# Altium PCB TSAL-P01-V00-TSALControl.PcbDoc
Units mm, origin at the board's own origin, x right, y up, seen from the top; angles counter-clockwise.
Board outline 48 x 24 mm, 2 copper layers (Top Layer, Bottom Layer), stack 1.569 mm thick; 23 components, 17 nets, 73 pads, 15 vias.
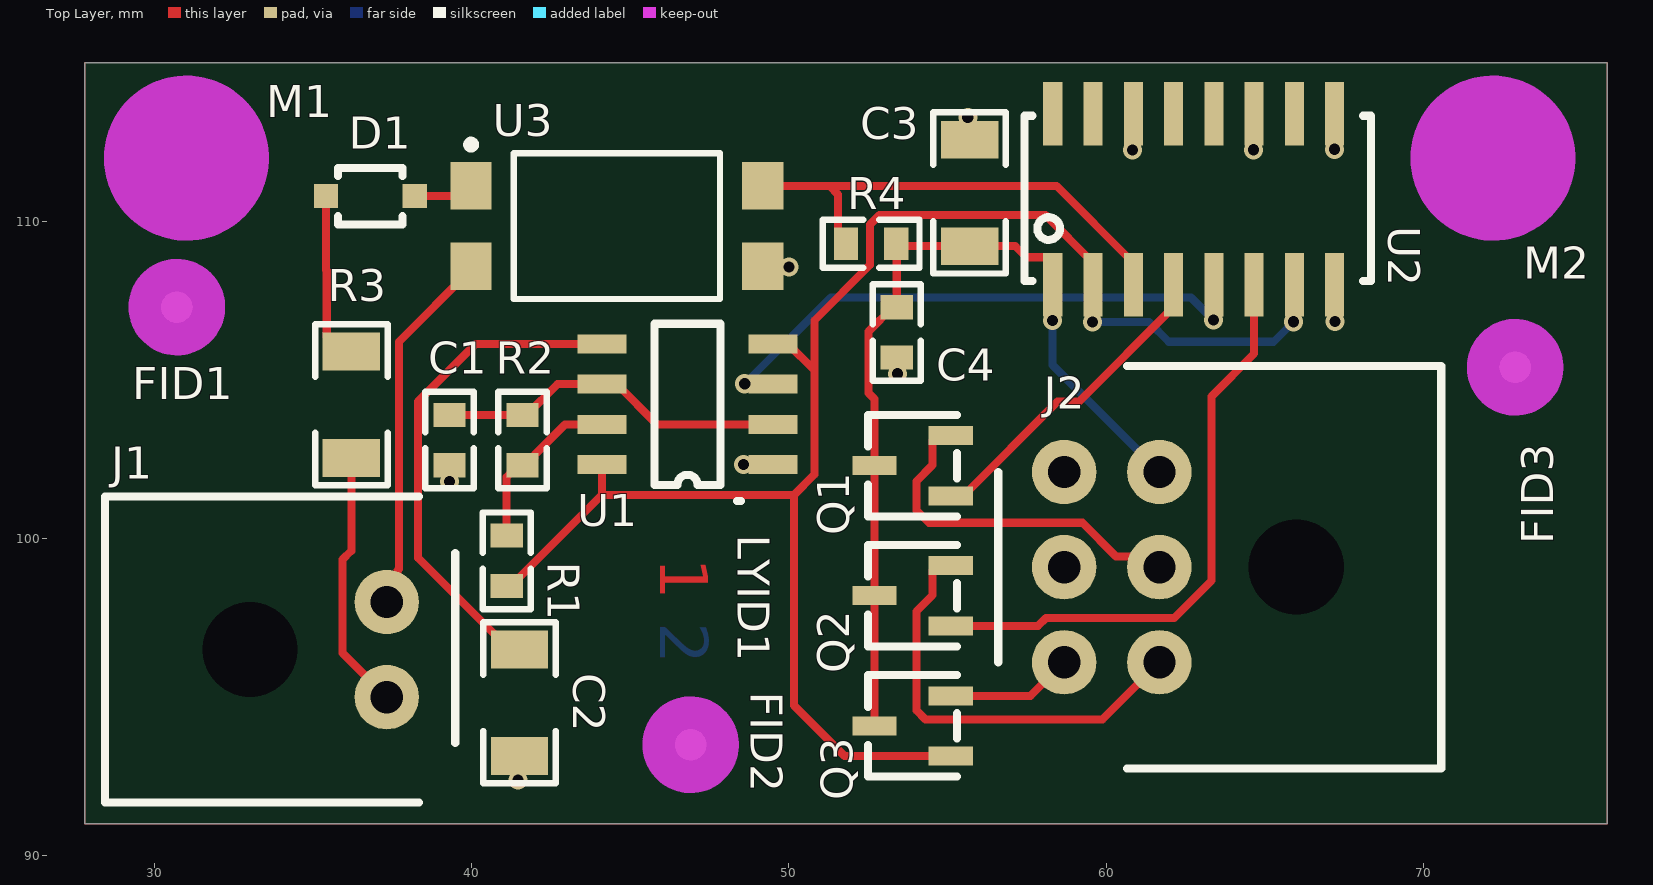
[diagram p0: Top Layer view]
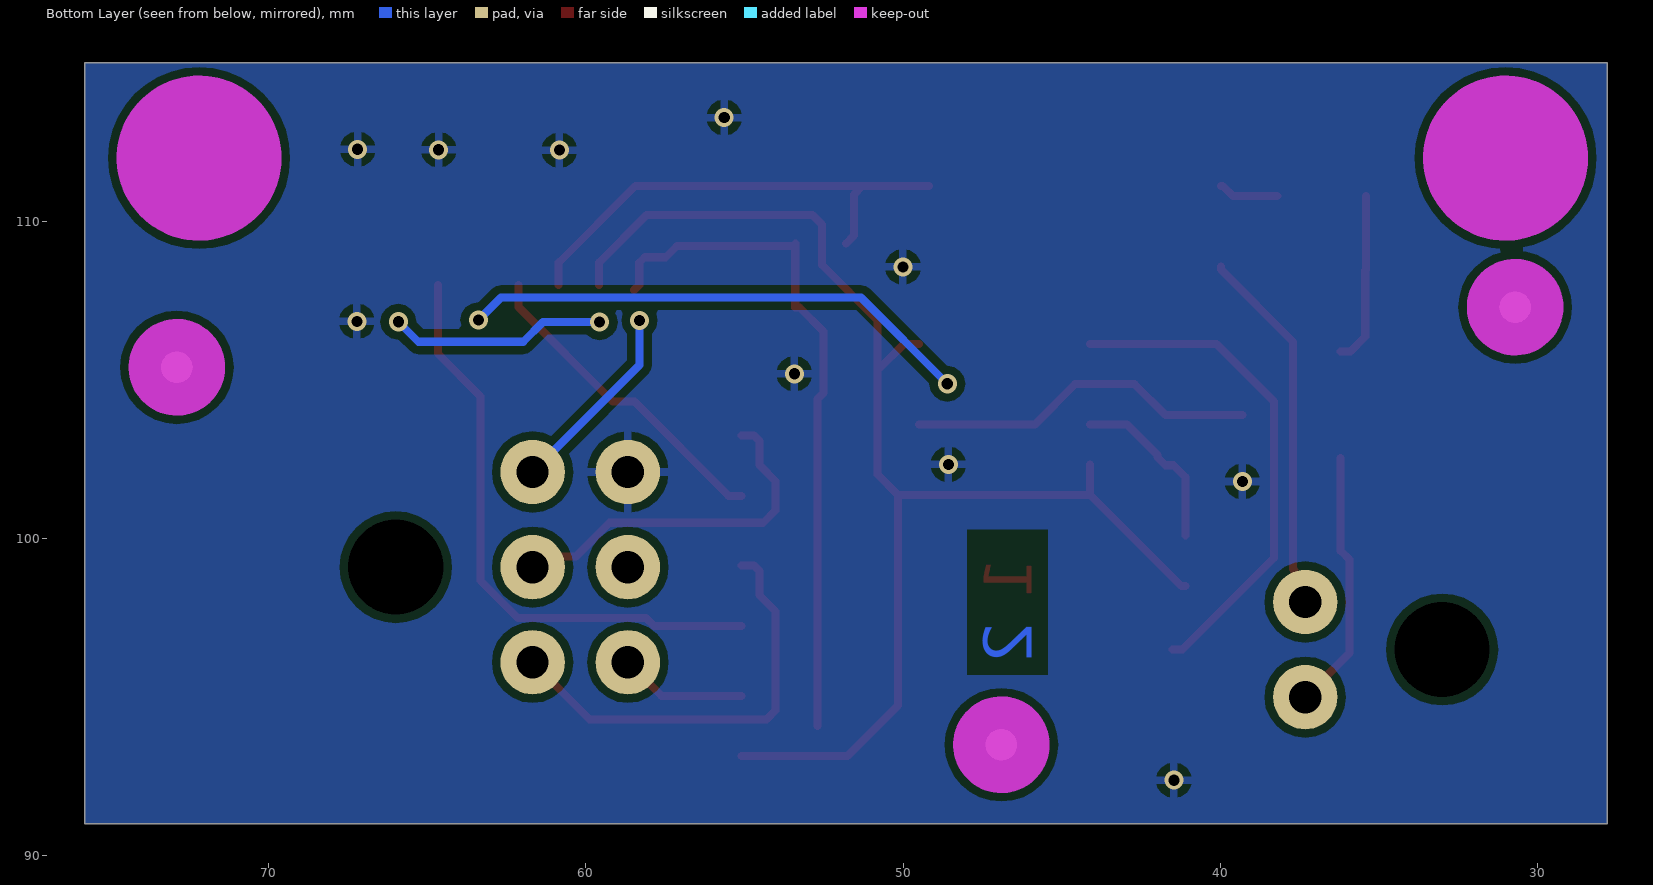
[diagram p1: Bottom Layer view, seen from below]
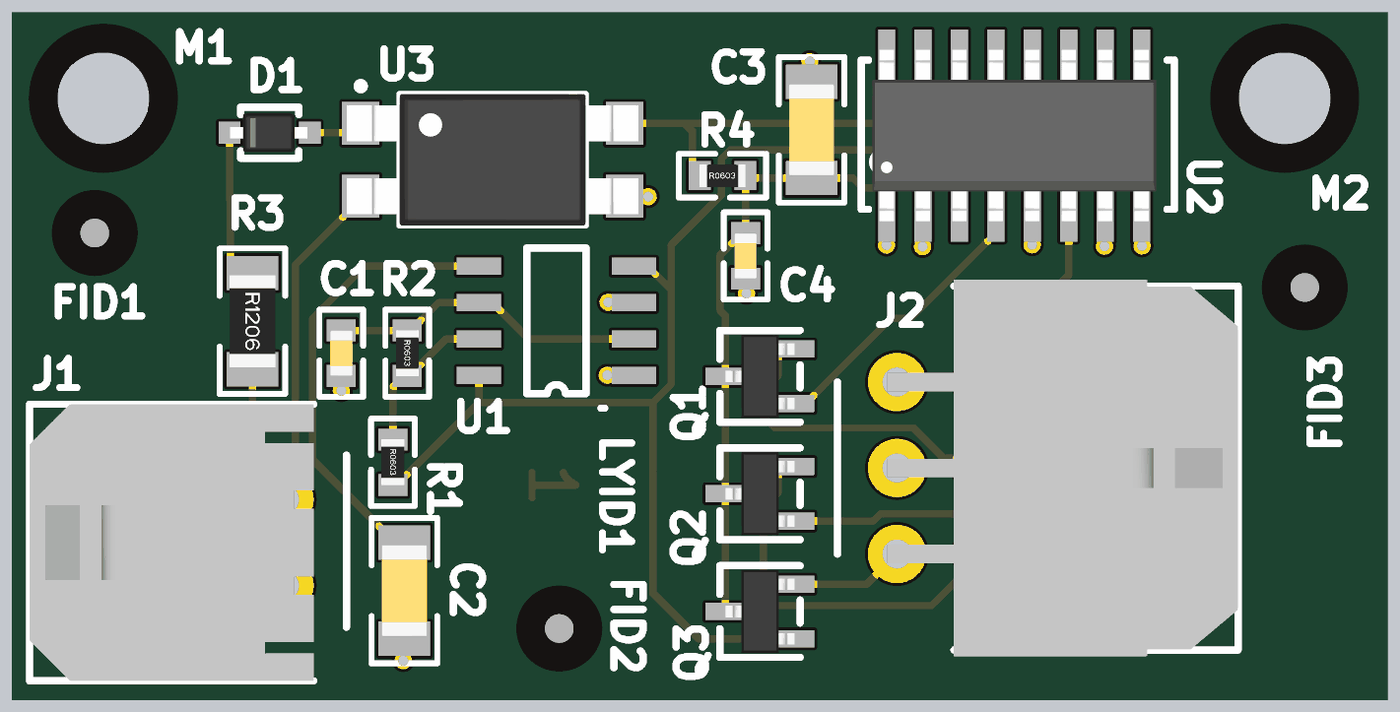
[diagram p2: 3D render of the assembled board from above, using the file's embedded part models]

## Layer stack, top to bottom
Top Solder: solder mask 0.0254, SM-001, Dk 4
Top Layer: signal copper 0.035
Dielectric 1: core 1.4986, Core-043, Dk 4.3
Bottom Layer: signal copper 0.035
Bottom Solder: solder mask 0.0254, SM-001, Dk 4

## Board outline
27.8,91 27.8,115 75.8,115 75.8,91

## Design rules (kind name [scope] priority, off if disabled: settings)
Clearance [All] p1: gap=0.254 ignorepadtopadclearanceinfootprint=FALSE except(0: Arc-Hole Track-Hole SMDPad-Hole THPad-Hole Via-Hole Fill-Hole Poly-Hole Region-Hole Text-Hole)
HoleSize [All] p1: absolutevalues=TRUE maxlimit=3.6 minlimit=0.025 maxpercent=80.000 minpercent=20.000
PolygonConnect [All] p1: connectstyle=Relief reliefconductorwidth=0.254 reliefentries=4 polygonreliefangle="90 Angle" airgapwidth=0.254
RoutingVias [All] p1: holewidth=0.711 width=1.27 viastyle="Through Hole" minholewidth=0.711 minwidth=1.27 maxholewidth=0.711 maxwidth=1.27
SilkToSilkClearance [All] p1: silktosilkclearance=0
SilkToSolderMaskClearance [IsPad] p1: minsilkscreentomaskgap=0 clearancetoexposedcopper=FALSE
SolderMaskExpansion [All] p1: expansion=0.102 istentingtop=FALSE
Width [All] p1: maxlimit=0.254 minlimit=0.254 preferedwidth=0.254
27 further rules are at their usual default settings.

## Components (designator, comment, footprint, x,y, rotation, side; value= is the part's Value field where it differs from the comment)
C1 "4u7 50V" Cap_Ceramic_0603 39.3,103.107 r90 top
C2 "10nF 25V 5% X7R 0402" Cap_Ceramic_1206 41.5,94.822 r90 top
C3 "22uF 35V" Cap_Ceramic_1206 55.7,110.9 r270 top
C4 "100nF 50V" Cap_Ceramic_0603 53.4,106.5 r90 top
D1 "MM3Z56VB" SOD-323F 34.009,110.673 r180 top
FID1 "Fiducial 1MM" "FIDUCIAL 1MM" 30.7,107.3 r270 top
FID2 "Fiducial 1MM" "FIDUCIAL 1MM" 46.9,93.5 r90 top
FID3 "Fiducial 1MM" "FIDUCIAL 1MM" 72.9,105.4 r180 top
J1 "Microfit 3.0 1x2" Microfit_1X2_R_TH 33,96.5 r270 top
J2 "Microfit 3.0 2x3" Microfit_2X3_R_TH 66,99.1 r90 top
LYID1 "2 Layer Identification PCB Marker" "LAYER IDENT 2" 46.7,98 r270 top
M1 "Hole M3 Tight Unplated" "M3.2 UNPLATED" 31,112 r0 top
M2 "Hole M3 Tight Unplated" "M3.2 UNPLATED" 72.2,112 r0 top
Q1 "CPH3351" SOT-23-3 53.9,102.3 r180 top
Q2 "CPH3351" SOT-23-3 53.9,98.2 r180 top
Q3 "CPH3351" SOT-23-3 53.9,94.093 r180 top
R1 "1k" Res_ThinFilm_0603 41.1,99.3 r270 top
R2 "51k" Res_ThinFilm_0603 41.6,103.107 r270 top
R3 "220R 5% 1206" Res_ThinFilm_1206 36.2,104.222 r270 top
R4 "1k 5% 0603" Res_ThinFilm_0603 52.593,109.3 r0 top
U1 "LM555CMX" "MCP2561 SOIC" 49.5,102.33 r180 top
U2 "CD4049UB" CD4049UB 67.21,108 r90 top
U3 "FOD817ASD" FOD817ASD 44.577,109.855 r0 top

## Footprints (in the part's own frame and the unit in brackets; to place one, negate y for a bottom-side part, rotate by r counter-clockwise, add the part's x,y. Pads: shape width x height; smd on the part's side, far side on the other; paste and mask are expansions set on the pad)
Cap_Ceramic_0603 [mil]
  rect 30x40 smd: 1(-31.24,0) 2(31.24,0)
  silkscreen extent -60,-30 60,30, body extent -31,-16 32,16, height 33
Cap_Ceramic_1206 [mil]
  rect 47x71 smd: 1(-66.08,0) 2(66.08,0)
  silkscreen extent -100,-45 100,45, body extent -63,-31 63,32, height 53
CD4049UB [mm]
  rect 2x0.6 smd: 1(0,8.89) 2(0,7.62) 3(0,6.35) 4(0,5.08) 5(0,3.81) 6(0,2.54) 7(0,1.27) 8(0,0) 9(5.4,0) 10(5.4,1.27) 11(5.4,2.54) 12(5.4,3.81) 13(5.4,5.08) 14(5.4,6.35) 15(5.4,7.62) 16(5.4,8.89)
  silkscreen extent 0.13,-1.14 5.33,9.78, body extent -0.29,-0.51 5.69,9.39, height 1.35
"FIDUCIAL 1MM" [mm]
  round 1 smd mask+1: 1(0,0)
  round 1 smd far side mask+1: 1(0,0)
  Keep-Out Layer circle w1.524: c0,0 r0.762
FOD817ASD [mm]
  rect 1.3x1.5 smd: 1(-4.6,1.27) 2(-4.6,-1.27) 3(4.6,-1.27) 4(4.6,1.27)
  silkscreen extent -4.72,-2.3 3.25,2.69, body extent -5.08,-2.3 5.08,2.3, height 3.85
"LAYER IDENT 2" [mm]
  Top Layer pour cut-out: 4.826,3.81
  Top Layer pour cut-out: -2.286,1.27 -2.286,-1.27 2.286,-1.27 2.286,1.27
  Top Layer pour cut-out: -0.254,0.762
  Top Layer pour cut-out: -0.508,-0.127
  Bottom Layer pour cut-out: -2.286,1.27 -2.286,-1.27 2.286,-1.27 2.286,1.27
"M3.2 UNPLATED" [mm]
  round 0 hole 3.2 unplated mask+2.6: 1(0,0)
  Keep-Out Layer circle w2.667: c0,0 r1.27
"MCP2561 SOIC" [mm]
  rect 1.55x0.6 smd: 1(0,0) 2(0,-1.27) 3(0,-2.54) 4(0,-3.81) 5(5.4,-3.81) 6(5.4,-2.54) 7(5.4,-1.27) 8(5.4,0)
  silkscreen extent 1.02,-4.44 3.74,1.14, body extent 0.51,-4.38 4.64,0.52, height 1.65
Microfit_1X2_R_TH [mil]
  round 80 hole 40: 1(59.06,170) 2(-59.06,170)
  round 0 hole 118.11 mask+10: NC(0,0)
  silkscreen extent -190,-180 190,255, body extent -190,-180 190,210, height 223
Microfit_2X3_R_TH [mil]
  round 80 hole 40: 1(118.11,170) 2(0,170) 3(-118.11,170) 4(118.11,288.19) 5(0,288.19) 6(-118.11,288.19)
  round 0 hole 118.11 mask+10: NC(0,0)
  silkscreen extent -250,-180 250,370, body extent -259,-180 259,302, height 350
Res_ThinFilm_0603 [mil]
  rect 30x40 smd: 1(-31.24,0) 2(31.24,0)
  silkscreen extent -60,-30 60,30, body extent -31,-16 32,16, height 18
Res_ThinFilm_1206 [mil]
  rect 47x71 smd: 1(-66.08,0) 2(66.08,0)
  silkscreen extent -100,-45 100,45, body extent -63,-31 63,32, height 24
SOD-323F [mil]
  rect 30x30 smd: 1(-165,-5) 2(-55,-5)
  silkscreen extent -150,-40 -70,30, body extent -162,-32 -56,22, height 33
SOT-23-3 [mm]
  rect 1.4x0.6 smd: D(1.2,0) G(-1.2,0.95) S(-1.2,-0.95)
  silkscreen extent -1.4,-1.6 1.4,1.6, body extent -1.2,-1.45 1.2,1.45, height 1

## Part data
C1: library part "4u7 50V 5% X7R 0603", "Capacitor, Ceramic, SMD, 4u7, 50V, 5%, X7R, 0603"
C2: "10000pF ±5% 25V Ceramic Capacitor X7R 0402 (1005 Metric)", ComponentLink1Description=Digikey, ComponentLink1URL=https://www.digikey.com/product-detail/en/murata-electronics/GRM155R71E103JA01J/490-6340-1-ND/3845537, ComponentLink2Description=Datasheet, ComponentLink2URL=https://search.murata.co.jp/Ceramy/image/img/A01X/G101/ENG/GRM155R71E103JA01-01.pdf
C3: library part "22uF 35V 20% X5R 1206", "22µF ±20% 35V Ceramic Capacitor X5R 1206 (3216 Metric)", ComponentLink1Description=Digikey, ComponentLink1URL=https://www.digikey.com.au/product-detail/en/tdk-corporation/C3216X5R1V226M160AC/445-8045-1-ND/2792165, ComponentLink2Description=Datasheet, ComponentLink2URL=https://product.tdk.com/info/en/catalog/datasheets/mlcc_commercial_general_en.pdf
C4: library part "100nF 50V 5% X7R 0603", "Capacitor, Ceramic, SMD, 100nF, 50V, 5%, X7R, 0603"
D1: "Zener Diode 56V 200mW ±2% Surface Mount SOD-323F", Manufacturer="ON Semiconductor", ComponentLink1Description=Digikey, ComponentLink1URL=https://www.digikey.com.au/product-detail/en/on-semiconductor/MM3Z56VB/MM3Z56VBCT-ND/1626897, ComponentLink2Description=Datasheet, ComponentLink2URL=https://www.onsemi.com/pub/Collateral/MM3Z9V1B-D.pdf, MPN=MM3Z56VB
J1: library part Microfit_1x2
J2: library part Microfit_2x3
LYID1: library part "Layer Identification 2"
M1 M2: "M3.2 Hole, No Plating"
Q1 Q2 Q3: "P-Channel 60V 1.8A (Ta) 1W (Ta) Surface Mount 3-CPH", ComponentLink1Description=Datasheet, ComponentLink1URL=https://www.onsemi.com/pub/Collateral/CPH3351-D.PDF, ComponentLink2Description=Digikey, ComponentLink2URL=https://www.digikey.com/products/en/discrete-semiconductor-products/transistors-fets-mosfets-single/278?k=&pkeyword=&sv=0&pv7=2&sf=0&FV=-1%7C488%2C-8%7C278&mpart=CPH3351-TL-W&quantity=&ColumnSort=0&page=1&stock=1&nstock=1&datasheet=1&photo=1&pageSize=25
R1: library part "1k 5% 0603", "Resistor, SMD, 1k, 0.1W, 5%, 0603"
R2: library part "51k 5% 0603", "51 kOhms ±0.1% 0.063W, 1/16W Chip Resistor 0402 (1005 Metric) Automotive AEC-Q200 Thin Film", ComponentLink1Description=Digikey, ComponentLink1URL=https://www.digikey.com.au/product-detail/en/panasonic-electronic-components/ERA-2AEB513X/P51KDCCT-ND/1706224, ComponentLink2Description=Datasheet1, ComponentLink2URL=https://industrial.panasonic.com/cdbs/www-data/pdf/RDM0000/AOA0000C307.pdf, ComponentLink3Description=Datasheet2, ComponentLink3URL=https://media.digikey.com/pdf/Data%20Sheets/Panasonic%20Resistors%20Thermistors%20PDFs/ERA_Series_LE.pdf, ComponentLink4Description=Datasheet3, ComponentLink4URL=https://industrial.panasonic.com/cdbs/www-data/pdf/RDM0000/DMM0000COL9.pdf
R3: "220 Ohms ±1% 0.25W, 1/4W Chip Resistor 1206 (3216 Metric) Moisture Resistant Thick Film", ComponentLink1Description=Digikey, ComponentLink1URL=https://www.digikey.com.au/product-detail/en/yageo/RC1206FR-07220RL/311-220FRCT-ND/731640, ComponentLink2Description=Datasheet, ComponentLink2URL=https://www.yageo.com/upload/media/product/productsearch/datasheet/rchip/PYu-RC_Group_51_RoHS_L_10.pdf
R4: "Resistor, SMD, 1k, 0.1W, 5%, 0603"
U1: "555 Type, Timer/Oscillator (Single) IC 100kHz 8-SOIC", ComponentLink1Description=Digikey, ComponentLink1URL=https://www.digikey.com.au/product-detail/en/texas-instruments/LM555CMX%2FNOPB/LM555CMX%2FNOPBCT-ND/1010545?utm_adgroup=Integrated%20Circuits&utm_source=google&utm_medium=cpc&utm_campaign=Dynamic%20Search_EN_Product&utm_term=&productid=&gclid=CjwKCAjwr7X4BRA4EiwAUXjbt-N3vibcCncJp7dB6lpBrLRT-QxYTJoHZmGPqFSswFIeP9Lhu7cYVBoCjmMQAvD_BwE, ComponentLink2Description=Datasheet, ComponentLink2URL=https://www.ti.com/general/docs/suppproductinfo.tsp?distId=10&gotoUrl=http%3A%2F%2Fwww.ti.com%2Flit%2Fgpn%2Flm555
U3: "Optoisolator 5kV Transistor 4SMD"

## Via types
v1: diameter 0.6, hole 0.35, Top Layer to Bottom Layer, 15 vias

## Nets (pads, with @x,y where several pads share a name; then routed paths per layer and width w, separated by ;. In a path a pad name is that pad's centre, name@x,y a point inside that pad or via, vN(x,y) a via of type N, cw(c..) or ccw(c..) an arc to the next point about the centre after c; other vN are vias at no path point)
12V: C3.2 C4.2 J2.1 Q1.D Q2.D Q3.D R4.2 U2.1 | length 28
  Top Layer w0.254: Q3.D Q2.D Q1.D 52.7,104.408 52.511,104.597 52.511,106.531 53.273,107.293 C4.2 R4.2@53.4,109.287 ; R4.2 R4.2@53.4,109.287 ; U2.1@58.481,107.839 U2.1 58.32,108.7 58.147,108.873 57.485,108.873 57.137,109.222 C3.2 53.465,109.222 R4.2@53.4,109.287
  Bottom Layer w0.254: v1(58.312,106.878) 58.312,105.47 J2.1
GND: C1.1 C2.1 C3.1 C4.1 J2.4 U1.1 U2.8 U2.9 U2.11 U2.14 U3.3
  other v1: 41.46,92.38 39.3,101.8 48.574,102.34 53.428,105.197 67.225,106.851 50.003,108.568 60.839,112.249 64.645,112.262 67.201,112.277 55.641,113.278
"HV IN": J1.1 R3.2 | length 8.2
  Top Layer w0.254: R3.2 36.2,99.615 35.921,99.336 35.921,96.397 J1.1
"HV ON": Q3.G R1.2 U1.4 U1.8 U2.2 U2.7 | length 49.9
  Top Layer w0.254: R1.2 41.227,98.507 44.1,101.38 ; U1.8 44.1,101.38 ; U1.4 49.975,106.14 50.8,105.315 ; Q3.G 51.757,93.143 50.163,94.737 50.163,101.38 ; U2.2 59.59,108.7 58.09,110.2 52.859,110.2 52.562,109.903 52.562,108.634 50.8,106.872 50.8,105.315 ; 44.1,101.38 50.163,101.38 ; 50.163,101.38 50.8,102.016 50.8,105.315
  Bottom Layer w0.254: v1(59.569,106.826) 61.36,106.826 61.977,106.208 65.287,106.208 v1(65.917,106.839)
"HV OUT": J1.2 U3.2 | length 11.7
  Top Layer w0.254: J1.2 37.658,98.34 37.658,98.996 37.7,99.038 37.7,106.208 39.977,108.485 U3.2
NetC2_2: C2.2 U1.5 | length 15.9
  Top Layer w0.254: C2.2 41.195,96.5 38.3,99.395 38.3,104.328 40.112,106.14 U1.5
NetD1_1: D1.1 U3.1 | length 1.9
  Top Layer w0.254: D1.1 39.6,110.8 39.925,111.125 U3.1
NetD1_2: D1.2 R3.1 | length 5.4
  Top Layer w0.254: D1.2 35.406,108.468 35.425,108.448 35.425,106.37 35.895,105.9 R3.1
NetJ2_2: J2.2 Q1.S | length 11.4
  Top Layer w0.254: Q1.S 54.7,103.25 54.527,103.077 54.527,102.316 54.019,101.808 54.019,100.892 54.411,100.5 59.256,100.5 60.315,99.44 61.342,99.44 J2.2
NetJ2_3: J2.3 Q2.S | length 13.8
  Top Layer w0.254: Q2.S 54.7,99.15 54.527,98.977 54.527,98.216 54.019,97.708 54.019,94.585 54.304,94.3 59.882,94.3 J2.3
NetJ2_6: J2.6 Q3.S | length 4
  Top Layer w0.254: Q3.S 57.623,95.043 J2.6
NetQ1_G: Q1.G U2.4 | length 10.2
  Top Layer w0.254: Q1.G 55.5,101.35 58.475,104.325 59.155,104.325 62.13,107.3 U2.4
NetQ2_G: Q2.G U2.6 | length 18.7
  Top Layer w0.254: Q2.G 57.854,97.25 58.104,97.5 62.151,97.5 63.324,98.673 63.324,104.484 64.67,105.83 U2.6
NetR4_1: R4.1 U2.3 U3.4 | length 15.4
  Top Layer w0.254: U3.4 51.275,111.125 ; R4.1 51.546,109.554 51.546,110.854 51.275,111.125 ; U2.3 60.86,108.7 58.435,111.125 51.275,111.125
NetU1_3: U1.3 U2.5 | length 16.2
  Bottom Layer w0.254: v1(48.607,104.883) 51.323,107.6 62.682,107.6 v1(63.393,106.889)
"RED LED SPLIT": R1.1 R2.2 U1.7 | length 5.6
  Top Layer w0.254: R1.1 41.1,101.94 41.473,102.313 R2.2 41.727,102.313 41.981,102.567 41.981,102.637 42.944,103.6 U1.7
THRESH-TRIG: C1.2 R2.1 U1.2 U1.6 | length 11.1
  Top Layer w0.254: C1.2 R2.1 41.727,103.9 42.697,104.87 U1.6 44.575,104.87 45.845,103.6 U1.2
pads on no net: FID1.1 FID2.1 FID3.1 J1.NC J2.5 J2.NC M1.1 M2.1 U2.10 U2.12 U2.13 U2.15 U2.16

## Polygon pours and split planes (outlines as drawn)
no net on Top Layer "NONET_L01_P000" (solid, remove dead copper, pour order 0): 27.8,91 75.8,91 75.8,115 27.8,115
GND on Bottom Layer "GND_L01_P-001" (solid, remove dead copper, pour order 3): 27.8,91 75.8,91 75.8,115 27.8,115
GND on Bottom Layer "GND_L01_P-001" (solid, remove dead copper, pour order 2): 82.8,99
GND on Bottom Layer "GND_L01_P-001" (solid, remove dead copper, pour order 1): 86,95.1

## Silkscreen, mask and mechanical layers (free items; w line width, h text height)
Mechanical 1:
  the board outline again, w0.254

## Text inside footprints (layer, text, board x,y; h text height)
LYID1: Top Layer "1" at 45.938,99.397 h1.52 r270; Bottom Layer "2" at 45.938,97.365 h1.52 r270